# Altium PCB SmallHandheldRev1.PcbDoc (part 2 of 2)
Units mm, origin at the board's own origin, x right, y up, seen from the top; angles counter-clockwise.
Board outline 50.04 x 64.01 mm, 6 copper layers (TopLayer, MidLayer1, MidLayer2, MidLayer3, MidLayer4, BottomLayer); 248 components, 164 nets, 692 pads, 230 vias.
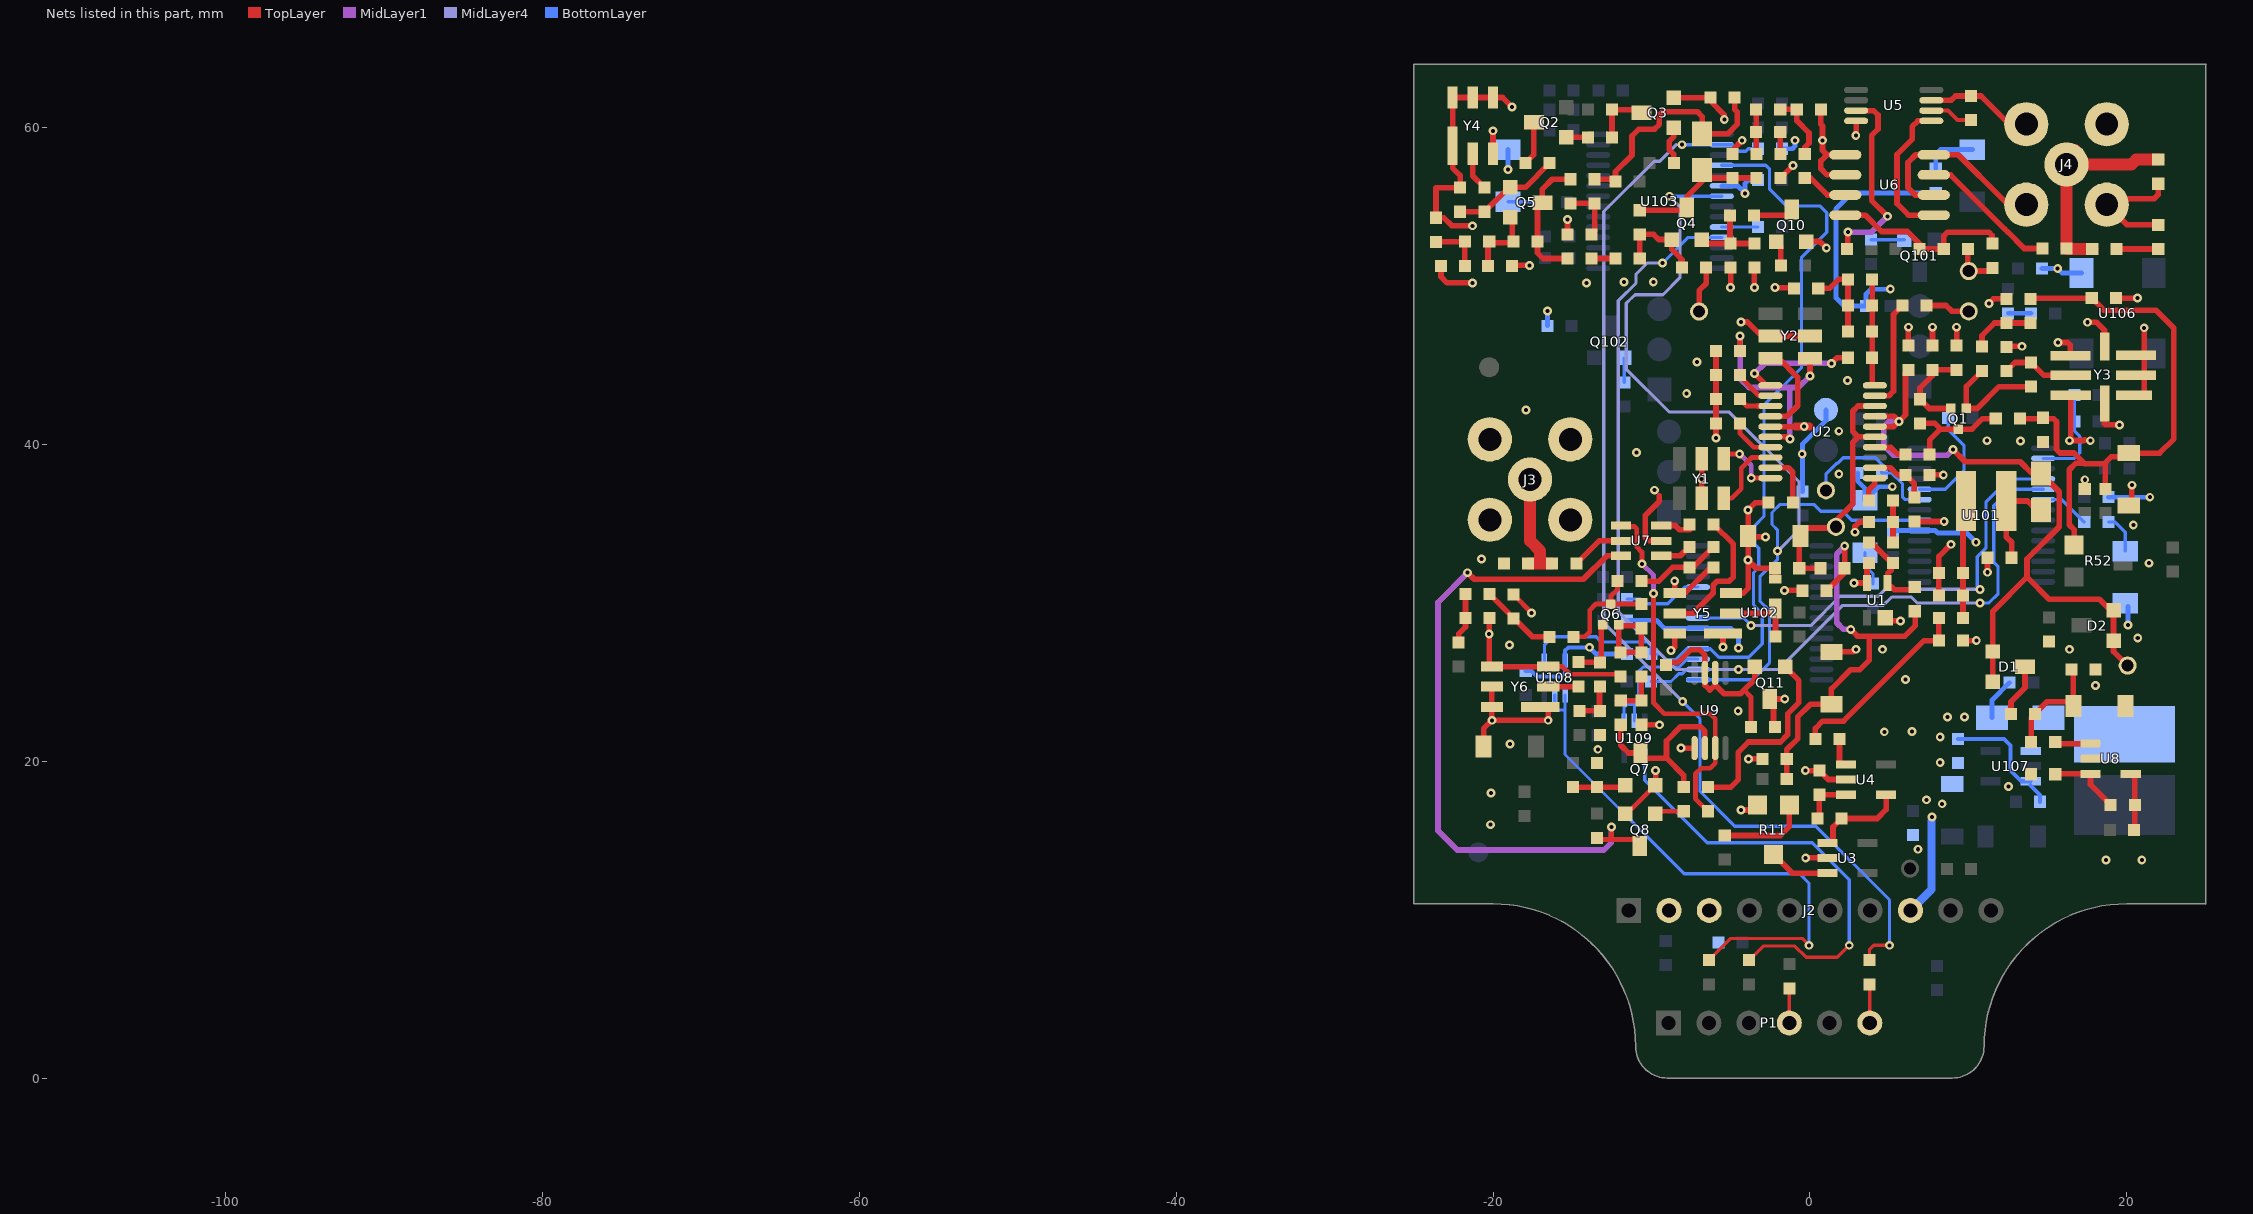
[diagram p6: the nets of this part, all layers, seen from the top]

## Via types
v1: diameter 0.559, hole 0.254, TopLayer to BottomLayer, tented both sides, 223 vias
v2: diameter 0.559, hole 0.254, TopLayer to BottomLayer, 7 vias

## Nets (pads, with @x,y where several pads share a name; then routed paths per layer and width w, separated by ;. In a path a pad name is that pad's centre, name@x,y a point inside that pad or via, vN(x,y) a via of type N, cw(c..) or ccw(c..) an arc to the next point about the centre after c; other vN are vias at no path point) (continued)
GND_SIGNAL: C3.2 C4.1 C5.2 C6.1 C7.2 C8.2 C10.2 C11.2 C12.2 C13.2 C14.2 C15.1 C16.1 C17.2 C18.2 C19.2 C22.2 C23.2 C25.2 C26.2 C27.1 C30.2 C31.2 C34.2 C35.1 C36.2 C41.2 C42.2 C45.2 C46.2 C47.1 C48.2 C50.2 C52.2 C53.2 C54.2 C56.2 C58.1 C61.2 D3.K FB101.1 J2.2 J2.3 J3.2 J3.3 J3.4 J3.5 J4.2 J4.3 J4.4 J4.5 L1.2 L6.2 L16.2 L17.1 Q3.E Q7.E Q8.E Q10.E Q11.C R2.2 R4.1 R6.2 R9.2 R11.3 R12.2 R15.2 R17.2 R18.1 R25.2 R26.2 R27.2 R28.2 R29.2 R36.2 R49.2 R55.1 R56.1 TP1.1 TP6.1 U1.1 U1.3 U2.15 U3.2 U4.2 U5.4 U5.7 U6.1 U6.2 U6.6 U6.8 U7.2 U8.2 U9.1 Y1.2 Y2.2 Y3.1 Y3.3 Y3.4 Y3.5 Y3.6 Y3.7 Y3.8 Y4.1 Y4.3 Y4.4 Y4.5 Y4.6 Y5.1 Y5.3 Y5.4 Y5.6 Y6.1 Y6.3 Y6.4 Y6.5 Y6.6 | length 185.1
  TopLayer w0.305: C42.2@-18.716,30.53 v1@-17.538,29.353 ; Y6.3@-16.51,25.975 -15.621,25.975 -15.138,25.492 -12.103,25.492 C46.2@-11.959,25.349 ; Q8.E@-11.666,16.691 -11.55,16.691 Q7.E@-9.749,18.491
  TopLayer w0.356: C36.2@-23.3,51.238 C36.2@-23.286,51.252 -23.286,50.586 -22.9,50.2 v1(-21.3,50.2) ; R25.2@-22.088,56.2 -23.6,56.2 -23.6,54.317 -23.117,54.317 -22.6,53.8 v1(-21.3,53.8) ; R25.2@-22.075,56.213 -22.075,56.975 -22.548,57.448 Y4.1@-22.548,58.854 Y4.6@-22.548,61.902 Y4.5@-21.278,61.902 Y4.4@-20.008,61.902 -19.402,61.902 v1(-18.8,61.3) ; C53.2@-20.595,20.929 -20.595,22.061 v1(-20.07,22.586) ; Y6.4@-20.244,25.975 C41.2@-20.244,29.006 ; C41.2@-20.24,29.006 C41.2@-20.214,29.032 ; Y6.5@-20.07,24.654 -20.07,24.081 v1(-20.07,22.586) ; Y6.4@-20.066,25.975 Y6.3@-16.51,25.975 ; Y4.3@-20,58.354 v1(-20,59.8) ; C35.1@-18.79,51.252 -18.742,51.3 v1(-17.7,51.3) ; Y6.1@-17.018,23.435 Y6.1@-16.51,23.435 ; Y6.1@-16.514,23.384 v1(-16.514,22.586) v1(-20.07,22.586) ; C27.1@-15.3,53.269 v1(-15.3,54.2) ; C47.1@-10.638,22.301 v1(-9.495,22.301) ; Q7.E@-9.749,18.491 Q7.E@-9.736,18.504 ; v1(-9.736,19.408) Q7.E@-9.736,18.504 ; Q7.E@-9.724,18.516 Q7.E@-9.736,18.504 ; -9.5,36.77 -9.5,36.414 -10.392,35.522 -10.392,35.22 -10.392,34.14 -10.163,33.912 U7.2@-9.38,33.912 ; v1@-8.738,27.016 -8.53,27.224 Y5.6@-8.53,28.069 ; Q3.E@-8.576,61.89 C26.2@-6.274,61.89 -6.274,61.674 -5.4,60.8 v1(-5.4,60.5) ; v1(-8.53,31.372) Y5.4@-8.53,30.609 -7.877,30.609 -6.251,32.235 L17.1@-6.074,32.235 ; v1(-8.136,20.831) U9.1@-7.272,20.831 ; TP1.1@-6.988,48.39 -6.988,49.712 -6.541,50.159 R26.2@-6.541,51.156 ; Y1.2@-6.826,36.302 Y1.2@-6.826,36.596 v1(-6.826,37.802) Y1.2@-6.826,38.802 ; v1(-5.926,40.416) C7.2@-5.926,41.33 C14.2@-5.926,42.854 C17.2@-5.926,44.378 R2.2@-5.926,45.902 ; v1(-5.482,27.206) Y5.1@-5.482,28.069 ; v1(-5,49.9) C34.2@-5,51.139 ; Y5.3@-4.974,30.609 -4.194,30.609 -3.894,30.91 v1(-3.894,32.693) ; C30.2@-4.89,58.322 C30.2@-4.89,58.344 -4.89,58.575 v1(-4.267,59.198) ; v1(-4.351,16.919) -3.598,16.919 R11.3@-3.294,17.224 ; v1(-4.346,47.729) -3.94,47.729 -3.055,46.845 Y2.2@-2.49,46.845 Y2.2@0.01,46.845 ; v1(-3.868,20.145) C8.2@-2.979,20.145 ; C12.2@-3.813,34.166 v1(-2.797,34.166) ; v1(-3.5,49.9) R27.2@-3.5,51.149 ; C5.2@-2.598,36.325 -3.437,36.325 v1(-3.894,35.868) C12.2@-3.894,34.217 v1(-3.894,32.693) ; U2.15@-2.493,41.124 -0.895,41.124 ; v1(-2.2,49.9) C61.2@-1.006,49.9 ; C48.2@-2.192,22.152 -2.294,22.253 -2.294,23.701 Q11.C@-2.522,23.93 v1(-1.582,23.93) ; D3.K@-2.167,31.525 -2.167,32.159 C13.2@-2.192,32.185 -3.386,32.185 v1(-3.894,32.693) ; C31.2@-1.842,56.82 -1.842,56.822 v1(-1.067,57.598) ; v1(-1.608,30.788) -0.49,30.788 C50.2@-0.465,30.762 ; v1(-0.287,19.408) R12.2@0.602,19.408 1.161,18.85 U4.2@2.278,18.85 ; v1(-0.262,13.897) U3.2@1.11,13.897 ; Q10.E@-0.215,52.807 0.625,52.807 v1(1.041,52.391) ; C45.2@0.7,61.147 0.7,60.2 0.8,60.1 v1(0.8,59.2) 0.8,58.567 1.084,58.284 ; C10.2@1.364,26.901 2.755,26.901 v1(2.921,27.067) ; U6.2@2.238,57.014 1.086,57.014 0.7,57.4 0.7,57.9 1.084,58.284 ; U6.1@2.238,58.284 1.084,58.284 ; v1(2.786,31.245) 2.794,31.253 U1.3@3.61,31.253 ; v1(2.845,34.458) 2.845,34.814 3.136,35.106 L1.2@3.726,35.106 ; v1@2.924,59.524 U5.4@2.924,60.423 ; U1.3@3.61,30.925 U1.3@3.61,31.253 ; C3.2@3.726,32.515 3.61,32.398 U1.3@3.61,31.253 ; U1.1@4.852,28.857 v1(5.733,28.857) ; C58.1@6.22,46.231 v1(6.22,47.399) ; C6.1@6.596,35.131 v1@8.484,35.131 ; C4.1@7.562,38.077 v1(8.425,38.077) ; U5.7@7.67,61.723 8.923,61.723 9.192,61.992 R55.1@10.185,61.992 10.808,61.992 12.205,60.595 12.586,60.214 J4.5@13.665,60.214 ; R18.1@7.744,46.231 v1(7.744,47.399) ; U6.6@7.826,55.744 6.656,55.744 6.2,56.2 6.2,57.8 6.684,58.284 U6.8@7.826,58.284 9.368,58.284 12.137,55.515 12.518,55.134 J4.4@13.665,55.134 ; R4.1@8.146,30.457 C16.1@8.146,31.88 8.146,32.82 8.146,32.927 v1(8.915,33.696) ; C23.2@9.268,46.231 v1(9.268,47.399) ; R9.2@9.67,27.613 v1(10.508,27.613) ; TP6.1@9.979,50.892 C54.2@9.979,52.34 ; TP6.1@10.033,50.943 11.201,50.943 R28.2@11.506,51.248 ; v1(11.219,31.931) C15.1@11.219,32.845 ; v1(11.3,48.9) 11.585,49.185 R15.2@12.413,49.185 ; L6.2@12.413,46.145 12.464,46.196 v1(13.404,46.196) ; R49.2@13.967,19.18 R49.2@14,19.147 ; v1(15.672,46.431) 16.121,46.431 16.281,46.431 16.452,46.261 Y3.1@16.452,45.604 ; Y3.3@16.477,43.089 16.477,40.329 16.561,40.246 17.306,40.246 17.357,40.296 ; C18.2@17.357,37.198 v1(17.357,37.769) ; v1(17.518,47.712) 18.099,47.712 18.602,47.209 Y3.8@18.602,46.397 ; Y3.4@18.602,41.897 18.602,41.294 18.661,41.235 v1(19.55,41.235) ; J4.3@18.745,55.134 20.015,53.864 20.828,53.864 C56.2@21.996,53.864 ; J4.3@18.745,55.515 19.177,55.515 21.742,55.515 21.996,55.769 R56.1@21.996,56.455 ; C22.2@19.322,49.236 v1(20.676,49.236) ; v1(20.329,37.426) 20.329,36.156 C52.2@20.354,36.131 ; Y3.5@21.101,43.089 21.101,44.359 21.101,45.629 v1@21.101,47.362
  TopLayer w0.508: -0.895,41.124 -0.006,41.124
  other v1: 18.694,13.757 20.955,13.757 6.833,14.443 -20.168,15.993 7.366,17.567 -20.117,17.999 12.548,18.406 -13.386,20.752 -18.923,21.098 4.699,21.86 6.452,21.885 -4.521,23.181 18.034,24.781 6.045,25.162 -8.763,26.991 4.597,27.067 16.383,27.067 -18.948,27.346 20.701,27.778 -20.24,28.041 -17.577,29.353 21.412,32.503 -20.726,32.757 20.422,34.916 8.484,35.144 -9.804,37.109 1.829,38.141 -10.947,39.488 1.829,40.834 -0.356,41.139 -17.907,42.18 -7.772,43.221 2.388,44.034 -7.112,45.203 21.107,47.362 -14.097,50.181 -11.735,50.257 -9.881,50.257 2.9,59.5
  other v2: 13.31,40.208 11.176,40.234 16.383,40.234 17.704,40.234
NBFLAG: U101.4 U102.21 | length 29
  MidLayer4 w0.203: v1(-3.708,28.566) 0.051,28.566 1.905,30.42 4.318,30.42 4.75,30.852 v1(10.744,30.852)
  BottomLayer w0.203: U102.21@-7.063,29.045 -4.188,29.045 v1(-3.708,28.566) ; v1(10.744,30.852) 10.566,31.029 10.566,32.909 11.125,33.468 11.125,36.389 12.553,37.817 U101.4@14.732,37.817
NetC1_1: C1.1 C3.1 L2.1 U1.4 | length 5.7
  TopLayer w0.356: C1.1@3.726,33.81 3.879,33.81 5.174,32.515 C3.1@5.25,32.515 5.123,32.388 5.123,32.058 4.91,31.844 U1.4@4.91,31.253 ; U1.4@4.92,30.991 4.91,31.001 U1.4@4.91,31.253 ; L2.1@6.622,30.991 6.467,30.836 5.327,30.836 U1.4@4.91,31.253
NetC1_2: C1.2 C2.1 L1.1 | length 2.6
  TopLayer w0.356: C1.2@5.25,33.81 L1.1@5.25,35.106 C2.1@5.25,36.452
NetC2_2: C2.2 U2.1 | length 1.6
  TopLayer w0.356: C2.2@3.726,36.452 3.726,37.138 4.107,37.519 U2.1@4.107,37.874
NetC4_2: C4.2 C6.2 U2.2 | length 3.8
  TopLayer w0.356: U2.2@4.107,38.524 5.083,38.524 5.53,38.077 C4.2@6.038,38.077 6.596,37.519 C6.2@6.596,36.655
NetC5_1: C5.1 U2.19 | length 3.5
  TopLayer w0.356: U2.19@-2.493,38.524 -1.343,38.524 -1.074,38.255 C5.1@-1.074,36.325
NetC7_1: C7.1 U2.17 | length 2.9
  TopLayer w0.305: C7.1@-4.402,41.33 -4.402,40.678 -3.548,39.824 U2.17@-2.493,39.824
  TopLayer w0.356: C7.1@-4.402,41.33 C7.1@-4.396,41.324
NetC8_1: C8.1 C10.1 C50.1 L2.2 R1.1 R3.1 | length 27.1
  TopLayer w0.356: R3.1@-1.455,18.875 C8.1@-1.455,20.145 -1.455,20.729 -0.77,21.415 -0.77,22.787 0.043,23.599 C10.1@1.364,23.599 1.364,24.565 2.583,25.784 3.162,25.784 3.759,26.381 3.759,27.9 ; C50.1@1.059,30.762 2.202,31.905 R1.1@2.202,32.185 v1(2.202,33.582) ; v1(2.583,28.324) 3.007,27.9 3.759,27.9 ; L2.2@6.622,29.467 6.647,29.441 6.647,28.547 6,27.9 3.759,27.9
  MidLayer1 w0.356: v1(2.202,33.582) 1.702,33.081 1.702,28.743 2.121,28.324 v1(2.583,28.324)
NetC9_1: C9.1 C20.1 L5.2 Q1.C | length 7.1
  TopLayer w0.356: C20.1@6.952,41.329 7.892,41.329 8.252,40.968 ; C9.1@7.562,39.373 7.562,40.278 8.252,40.968 ; L5.2@11.735,41.631 10.897,41.631 10.234,40.968 Q1.C@9.382,40.968 8.252,40.968
NetC9_2: C9.2 U2.4 | length 2.1
  TopLayer w0.356: U2.4@4.107,39.824 5.104,39.824 5.555,39.373 C9.2@6.038,39.373
NetC11_1: C11.1 Q7.B R40.2 | length 3.4
  TopLayer w0.356: R40.2@-14.956,18.364 C11.1@-13.432,18.364 -11.781,18.364 Q7.B@-11.654,18.491
NetC12_1: C12.1 C13.1 R1.2 TP2.1 U2.5 U2.8 | length 16.6
  TopLayer w0.356: R1.2@0.678,32.185 C13.1@-0.668,32.185 -0.668,34.14 C12.1@-0.592,34.217 -0.592,34.471 -0.338,34.725 1.572,34.725 TP2.1@1.648,34.801 1.648,35.186 2.71,36.249 2.71,40.128 3.057,40.474 ; U2.5@4.107,40.474 3.057,40.474 ; U2.8@4.107,42.424 3.044,42.424 2.71,42.091 2.71,40.821 3.057,40.474
NetC14_1: C14.1 U2.13 | length 2.9
  TopLayer w0.305: C14.1@-4.402,42.854 -3.972,42.424 U2.13@-2.493,42.424
  TopLayer w0.356: -3.306,42.424 U2.13@-2.493,42.424
NetC15_2: C15.2 L3.1 L4.1 | length 6.2
  TopLayer w0.356: C15.2@12.743,32.845 12.743,33.822 12.4,34.166 L4.1@12.4,36.426 13.739,36.426 14.298,35.868 L3.1@14.602,35.868
NetC16_2: C16.2 C51.2 L4.2 R4.2 | length 7.5
  TopLayer w0.356: C51.2@9.67,29.035 R4.2@9.67,30.457 C16.2@9.67,31.88 9.67,36.236 L4.2@9.86,36.426 ; L4.2@9.67,36.426 L4.2@9.67,36.503
NetC17_1: C17.1 U2.12 | length 2.5
  TopLayer w0.305: C17.1@-4.402,44.378 -4.402,44.269 -3.207,43.074 U2.12@-2.493,43.074
NetC19_1: C19.1 C22.1 C52.1 L5.1 R7.1 R13.1 R52.1 | length 37.4
  TopLayer w0.356: L5.1@13.259,41.631 14.757,41.631 14.783,41.656 14.808,41.631 15.392,41.631 15.576,41.447 15.576,39.684 15.803,39.457 16.673,39.457 17.311,38.818 ; R13.1@14.165,49.236 C22.1@17.798,49.236 18.56,48.474 21.836,48.474 22.979,47.331 22.979,40.346 22.082,39.449 C52.1@20.135,39.449 ; R52.1@16.685,33.642 16.685,34.623 16.38,34.928 16.38,38.4 16.798,38.818 17.311,38.818 ; R7.1@18.652,37.198 18.652,38.696 18.576,38.772 ; C52.1@20.601,39.433 20.354,39.433 20.354,39.28 20.405,39.23 20.135,39.23 19.033,39.23 18.576,38.772 ; 17.311,38.818 17.357,38.772 18.576,38.772
NetC20_2: C20.2 C23.1 Q1.E R18.2 | length 5.9
  TopLayer w0.356: Q1.E@8.882,42.268 7.536,42.268 C20.2@6.952,42.853 6.952,43.559 7.744,44.351 R18.2@7.744,44.707 C23.1@9.268,44.707
NetC21_1: C21.1 Q1.B R14.1 | length 7.4
  TopLayer w0.356: R14.1@10.871,44.644 9.882,43.655 Q1.B@9.882,42.268 10.568,42.268 11.946,43.646 12.262,43.646 12.5,43.646 C21.1@13.969,43.646
NetC21_2: C21.2 L6.1 Y3.2 | length 4.3
  TopLayer w0.356: L6.1@12.413,44.621 12.962,45.17 C21.2@13.969,45.17 14.779,44.359 Y3.2@16.121,44.359
NetC24_1: C24.1 C49.1 L18.1 R54.2 U2.10 | length 6.8
  TopLayer w0.356: C49.1@3.934,50.422 R54.2@3.934,48.771 L18.1@3.934,47.12 C24.1@3.934,45.469 3.934,43.897 U2.10@4.107,43.724
NetC24_2: C24.2 U2.11 | length 7.6
  TopLayer w0.356: v1(-3.483,44.478) -2.729,43.724 U2.11@-2.493,43.724 ; v1(1.369,45.113) 1.724,45.469 C24.2@2.41,45.469
  MidLayer1 w0.356: v1(-3.483,44.478) -2.848,45.113 v1(1.369,45.113)
NetC25_1: C25.1 R16.1 R17.1 R37.1 | length 7.1
  TopLayer w0.356: R37.1@13.967,21.212 13.967,22.736 R16.1@14.221,22.99 14.983,23.752 C25.1@16.634,23.752 ; R17.1@16.507,25.784 16.634,25.657 C25.1@16.634,23.752 ; C25.1@16.634,23.498 C25.1@16.634,23.752 ; C25.1@16.761,23.752 C25.1@16.634,23.752
NetC26_1: C26.1 FB6.2 L7.1 R20.1 | length 15.5
  TopLayer w0.356: R20.1@-13.453,56.607 R20.1@-13.583,56.738 FB6.2@-12.399,56.738 ; FB6.2@-12.268,56.607 -12.268,57.217 -11.227,58.258 -11.227,59.468 -10.795,59.9 -9.8,59.9 -9.5,60.2 -9.5,60.798 -9.298,61 -7.1,61 -6.795,60.695 L7.1@-6.795,59.614 -5.176,59.614 -4.574,60.216 -4.574,60.974 -4.75,61.15 C26.1@-4.75,61.89
NetC27_2: C27.2 L8.1 R20.2 | length 3.6
  TopLayer w0.356: L8.1@-15.107,55.214 R20.2@-13.583,55.214 -13.583,53.461 C27.2@-13.787,53.258
NetC28_1: C28.1 U6.3 | length 3
  TopLayer w0.356: C28.1@-0.318,56.82 0.041,56.82 1.118,55.744 U6.3@2.238,55.744
NetC28_2: C28.2 C45.1 L12.2 | length 4.3
  TopLayer w0.356: L12.2@-1.866,61.147 C45.1@-0.824,61.147 -0.824,60.443 -0.051,59.669 -0.051,59.02 -0.318,58.753 C28.2@-0.318,58.344
NetC29_1: C29.1 L10.1 | length 1.5
  TopLayer w0.356: C29.1@-13.787,51.734 L10.1@-12.263,51.734
NetC29_2: C29.2 C33.2 L8.2 Q5.C | length 8.2
  TopLayer w0.356: C29.2@-15.311,51.734 -16.834,51.734 -17.19,52.09 C33.2@-17.19,52.801 -17.19,54.96 Q5.C@-16.885,55.265 -16.885,56.115 -16.262,56.738 L8.2@-15.107,56.738
NetC30_1: C30.1 L7.2 L9.1 Q4.C R24.1 | length 8.7
  TopLayer w0.356: R24.1@-10.739,54.782 Q4.C@-7.76,54.782 ; Q4.C@-7.76,54.966 -7.76,55.64 -6.795,56.605 L7.2@-6.795,57.328 ; L7.2@-6.287,56.82 C30.1@-4.89,56.82 L9.1@-3.366,56.82
NetC31_1: C31.1 L15.2 | length 1.4
  TopLayer w0.356: C31.1@-1.866,58.368 L15.2@-1.866,59.724
NetC32_1: C32.1 Y4.2 | length 2.4
  TopLayer w0.356: Y4.2@-21.278,58.346 -21.278,56.948 C32.1@-20.543,56.213
NetC32_2: C32.2 Q5.B R23.2 R25.1 | length 6.9
  TopLayer w0.356: R25.1@-22.075,54.689 C32.2@-20.543,54.689 -19.002,56.23 Q5.B@-18.917,56.23 -17.959,56.23 R23.2@-16.426,57.762
NetC33_1: C33.1 C35.2 L11.1 Q5.E | length 4.7
  TopLayer w0.356: C35.2@-20.314,51.252 -20.314,52.725 -18.79,52.725 -18.79,54.198 Q5.E@-18.917,54.325
NetC34_1: C34.1 Q4.E R27.1 R30.2 | length 5.2
  TopLayer w0.356: Q4.E@-6.821,52.934 -6.567,52.68 C34.1@-5.017,52.68 R27.1@-3.493,52.68 ; C34.1@-5.043,52.706 R30.2@-5.043,54.458
NetC36_1: C36.1 L11.2 R29.1 | length 3.3
  TopLayer w0.356: R29.1@-23.591,52.784 -21.779,52.784 C36.1@-21.779,51.269
NetC37_1: C37.1 J4.1 L19.2 R56.2 | length 14
  TopLayer w0.762: C37.1@16.205,52.365 J4.1@16.205,57.674 ; C37.1@16.231,52.34 L19.2@17.831,52.34 ; J4.1@16.739,58.588 16.205,58.055 J4.1@16.205,57.674 ; R56.2@21.996,57.979 20.599,57.979 20.295,57.674 J4.1@16.205,57.674
NetC37_2: C37.2 U6.7 | length 8.8
  TopLayer w0.356: U6.7@7.826,57.014 8.886,57.014 12.33,53.57 12.5,53.4 13.535,52.365 C37.2@14.681,52.365
NetC38_1: C38.1 D3.A R46.2 Y5.2 | length 5
  TopLayer w0.356: Y5.2@-4.974,29.339 -2.218,29.339 C38.1@-2.167,29.391 ; R46.2@-2.167,27.867 C38.1@-2.167,29.391 ; D3.A@-2.167,30.051 C38.1@-2.167,29.391
NetC39_1: C39.1 U7.1 | length 1.9
  TopLayer w0.356: U7.1@-9.38,34.877 -8.495,34.877 -8.242,34.624 -7.598,34.624 C39.1@-7.585,34.624
NetC39_2: C39.2 Y5.5 | length 8.8
  TopLayer w0.356: Y5.5@-8.53,29.339 -7.369,29.339 -6.099,30.61 -6.099,31.118 -5.845,31.372 -5.083,31.372 -4.829,31.626 -4.829,33.709 C39.2@-6.074,34.953
NetC40_1: C40.1 C60.2 L17.2 | length 5.6
  TopLayer w0.356: C40.1@-10.625,31.372 -9.528,31.372 -8.664,32.235 L17.2@-7.598,32.235 ; L17.2@-7.725,32.362 L17.2@-7.598,32.235 ; C60.2@-6.074,33.556 -7.394,32.235 L17.2@-7.598,32.235
NetC40_2: C40.2 C43.1 L13.2 Q6.C | length 7.5
  TopLayer w0.305: L13.2@-14.91,27.854 -14.199,27.854 -13.894,28.159 -13.894,29.544 -13.513,29.925 Q6.C@-12.561,29.925 ; Q6.C@-12.555,29.925 -12.555,30.432 -12.149,30.838 C40.2@-12.149,31.372 ; Q6.C@-12.552,29.921 C43.1@-10.638,29.921
NetC41_1: C41.1 R33.2 R43.2 | length 3.2
  TopLayer w0.356: R43.2@-22.17,27.512 -22.17,28.041 -21.738,28.473 C41.1@-21.738,29.032 R33.2@-21.738,30.556
NetC42_1: C42.1 L13.1 R33.1 | length 5.1
  TopLayer w0.356: R33.1@-20.213,30.557 R33.1@-20.214,30.556 -17.513,27.854 -16.967,27.854 ; -17.196,27.854 -16.967,27.854 ; L13.1@-16.434,27.854 -16.967,27.854
NetC43_2: C43.2 C46.1 L14.2 Q6.E | length 6.4
  TopLayer w0.356: C46.1@-12.162,26.873 -12.061,26.974 Q6.E@-12.061,28.625 -11.985,28.549 -10.791,28.549 C43.2@-10.638,28.397 L14.2@-10.638,26.873 C46.1@-11.959,26.873 C46.1@-12.162,26.873
NetC44_1: C44.1 Q6.B R35.1 | length 3.7
  TopLayer w0.356: C44.1@-14.605,26.254 R35.1@-13.335,26.254 ; R35.1@-13.178,26.254 -13.178,28.508 Q6.B@-13.061,28.625
NetC44_2: C44.2 Y6.2 | length 2
  TopLayer w0.356: Y6.2@-16.51,24.705 C44.2@-14.548,24.705
NetC47_2: C47.2 L14.1 R39.2 | length 3
  TopLayer w0.356: R39.2@-12.162,23.825 R39.2@-11.934,23.825 C47.2@-10.638,23.825 L14.1@-10.638,25.349
NetC48_1: C48.1 Q11.E R38.1 U9.6 U9.7 | length 13.2
  TopLayer w0.305: -4.148,24.488 -3.716,24.057 C48.1@-3.716,22.152
  TopLayer w0.356: R38.1@-9.075,26.063 -8.898,26.241 -8.313,26.241 -7.526,27.028 -6.942,27.028 -6.622,26.709 U9.7@-6.622,25.577 -6.622,24.804 -6.307,24.488 U9.6@-5.972,24.823 ; U9.6@-5.972,25.831 U9.6@-5.972,25.577 U9.6@-5.972,24.823 ; Q11.E@-3.462,25.962 -3.462,25.174 -4.148,24.488 -4.376,24.26 -5.409,24.26 U9.6@-5.972,24.823
NetC49_2: C49.2 C61.1 L18.2 R54.1 | length 5.4
  TopLayer w0.356: C61.1@0.533,49.851 1.251,49.851 1.822,50.422 C49.2@2.41,50.422 R54.1@2.41,48.771 L18.2@2.41,47.12
NetC51_1: C51.1 R8.1 R9.1 | length 12.4
  TopLayer w0.356: R8.1@0.348,21.415 0.348,22.075 0.805,22.533 2.133,22.533 7.213,27.613 R9.1@8.146,27.613 ; R9.1@8.019,27.486 R9.1@8.146,27.613 ; C51.1@8.146,29.035 R9.1@8.146,27.613
NetC54_1: C54.1 R5.2 R28.1 U6.4 | length 11.7
  TopLayer w0.356: U6.4@2.238,54.474 3.5,54.474 4.533,53.441 6.159,53.441 6.931,52.669 R5.2@6.931,52.34 C54.1@8.455,52.34 8.455,53.155 8.7,53.4 11.3,53.4 11.503,53.197 R28.1@11.503,52.848
NetC56_1: C56.1 L19.1 | length 2.6
  TopLayer w0.356: L19.1@19.355,52.34 C56.1@21.946,52.34
NetC58_2: C58.2 D1.A D2.A L3.2 TP3.1 U2.6 U2.7 | length 45.6
  TopLayer w0.356: U2.6@4.107,41.124 5.3,41.124 v1(5.631,41.456) ; U2.7@4.107,41.774 5.313,41.774 v1(5.631,41.456) ; C58.2@6.22,44.707 6.042,44.529 6.042,41.867 v1(5.631,41.456) ; v1(9.035,39.678) 9.809,38.903 13.284,38.903 14.034,38.154 L3.2@14.602,38.154 15.745,37.011 15.745,34.801 13.713,32.769 13.713,31.626 ; D1.A@11.554,25.022 D1.A@11.554,26.927 11.554,29.467 13.713,31.626 ; TP3.1@20.063,26.038 19.174,26.927 D2.A@19.174,27.613 D2.A@19.174,29.518 18.996,29.518 18.285,30.229 15.11,30.229 13.713,31.626
  MidLayer1 w0.356: v1(5.631,41.456) 5.016,41.456 4.674,41.113 4.674,39.919 5.283,39.31 8.667,39.31 v1(9.035,39.678)
NetC59_1: C59.1 J3.1 L16.1 | length 7
  TopLayer w0.762: L16.1@-17.783,32.486 C59.1@-16.264,32.472 ; J3.1@-17.661,37.781 -17.656,33.912 -17.021,33.277 -17.021,32.515
NetC59_2: C59.2 U7.5 | length 3.4
  TopLayer w0.356: C59.2@-14.74,32.472 -13.3,33.912 U7.5@-11.92,33.912
NetC60_1: C60.1 U7.3 | length 2
  TopLayer w0.356: U7.3@-9.38,32.972 -8.182,32.972 C60.1@-7.598,33.556
NetC62_1: C62.1 TP4.1 | length 2.8
  TopLayer w0.356: C62.1@7.363,48.771 8.6,48.771 8.968,48.403 TP4.1@10.033,48.403
NetC62_2: C62.2 U2.9 | length 6.9
  TopLayer w0.356: U2.9@4.107,43.074 4.994,43.074 5.28,43.361 5.28,48.212 C62.2@5.839,48.771
NetC121_2: C121.2 R126.1 | length 1.4
  BottomLayer w0.305: R126.1@12.522,48.276 C121.2@13.97,48.276
NetD1_K: D1.K R16.2 | length 3.3
  TopLayer w0.356: R16.2@12.697,22.99 12.697,23.752 13.586,24.641 D1.K@13.586,25.962
NetD4_A: D4.A R32.1 | length 3.4
  BottomLayer w0.305: R32.1@7.95,57.404 7.95,58.318 8.255,58.623 10.251,58.623 D4.A@10.262,58.613
NetD101_K: D101.K R111.1 | length 2.5
  BottomLayer w0.203: R111.1@18.847,35.093 19.279,35.093 19.914,34.458 D101.K@19.914,33.264
NetD102_K: D102.K R119.1 | length 2.2
  BottomLayer w0.203: D102.K@3.48,33.164 3.48,32.35 3.988,31.842 R119.1@3.988,31.207
NetD103_K: D103.K R118.1 | length 2.2
  BottomLayer w0.203: D103.K@-19.05,55.313 R118.1@-16.866,55.313
NetD105_A: D105.A L102.2 U107.1
NetL9_2: L9.2 L12.1 L15.1 | length 2.8
  TopLayer w0.356: L9.2@-3.39,58.368 L15.1@-3.39,59.724 L12.1@-3.39,61.147
NetL10_2: L10.2 Q4.B R24.2 R26.1 | length 5.7
  TopLayer w0.356: L10.2@-10.739,51.734 R24.2@-10.739,53.258 -9.858,53.258 -9.534,52.934 Q4.B@-8.726,52.934 -8.726,52.326 -8.065,51.665 R26.1@-8.065,51.156
NetP1_4: P1.4 R112.1 | length 2.2
  TopLayer w0.203: P1.4@-1.295,3.48 R112.1@-1.295,5.664
NetQ2_B: Q2.B R21.2 | length 1.4
  TopLayer w0.356: Q2.B@-15.387,59.38 R21.2@-14.015,59.38
NetQ2_C: Q2.C R23.1 | length 2.8
  TopLayer w0.356: R23.1@-17.95,57.762 -17.419,58.294 Q2.C@-17.419,60.345
NetQ3_B: Q3.B R22.1 | length 2.4
  TopLayer w0.356: R22.1@-8.585,57.776 -8.585,58.309 -8.865,58.588 -8.865,59.146 -8.584,59.427 Q3.B@-8.584,59.977
NetQ3_C: Q3.C R19.2 R21.1 | length 3.7
  TopLayer w0.356: R21.1@-12.491,59.38 R19.2@-12.491,61.132 -10.806,61.132 Q3.C@-10.616,60.942
NetQ7_C: Q7.C R39.1 R51.1 U9.2 | length 12.1
  TopLayer w0.356: R39.1@-11.934,22.301 -11.934,21.005 -11.451,20.523 Q7.C@-10.689,20.523 -10.689,20.208 -10.701,20.196 -10.689,20.196 -9.05,20.196 ; R51.1@-7.958,18.367 -7.958,19.104 -9.05,20.196 ; U9.2@-6.622,20.831 -6.622,21.908 -6.891,22.177 -8.161,22.177 -9.05,21.288 -9.05,20.196
NetQ8_B: Q8.B R42.1 | length 1.9
  TopLayer w0.305: Q8.B@-9.761,16.691 -9.609,16.843 R42.1@-7.958,16.843
NetQ8_C: Q8.C R41.1 U7.4 | length 44.4
  TopLayer w0.305: R41.1@-13.444,15.167 -13.343,15.065 -12.53,15.065 ; v1(-12.53,15.852) -12.53,15.065 ; Q8.C@-10.777,15.065 -12.53,15.065 ; Q8.C@-10.726,14.659 Q8.C@-10.726,15.014
  TopLayer w0.356: v1(-21.6,31.9) -21.187,31.487 -20.625,31.487 ; -20.98,31.487 -20.625,31.487 ; U7.4@-11.92,32.972 -12.815,32.972 -14.3,31.487 -20.625,31.487
  MidLayer1 w0.356: v1(-21.6,31.9) -23.47,30.03 -23.47,15.612 -22.258,14.4 -13,14.4 -12.53,14.87 v1(-12.53,15.852)
NetQ10_B: Q10.B R48.1 | length 1.6
  TopLayer w0.356: Q10.B@-2.12,52.807 -1.829,52.516 R48.1@-1.829,51.299
NetQ10_C: Q10.C R30.1 | length 2.5
  TopLayer w0.356: R30.1@-3.519,54.458 -1.536,54.458 Q10.C@-1.155,54.839
NetQ11_B: Q11.B R51.2 | length 12.4
  TopLayer w0.356: R51.2@-6.434,18.367 -4.986,18.367 -4.529,18.824 -4.529,20.551 -3.868,21.212 -1.862,21.212 -1.405,21.669 -1.405,22.99 -0.693,23.701 -0.693,25.098 Q11.B@-1.557,25.962
NetQ101_B: Q101.B R120.2 | length 2.1
  BottomLayer w0.203: R120.2@3.861,52.924 Q101.B@5.969,52.924
NetQ102_B: Q102.B R121.2 | length 1.5
  BottomLayer w0.203: R121.2@-11.709,43.907 Q102.B@-11.709,45.457
NetR2_1: R2.1 U2.16 Y2.1 | length 14
  TopLayer w0.305: R2.1@-4.402,45.902 v1@-4.402,46.836
  TopLayer w0.356: U2.16@-2.493,40.474 v1@-1.388,40.474 ; v1(0.01,44.329) Y2.1@0.01,45.445
  MidLayer1 w0.356: v1(-4.397,46.84) -4.397,44.148 -3.838,43.589 -0.731,43.589 v1(0.01,44.329) ; v1(-1.261,40.347) -1.261,43.581
NetR8_2: R8.2 U4.1 | length 2
  TopLayer w0.356: R8.2@1.872,21.415 1.872,19.815 1.897,19.789 U4.1@2.278,19.789
NetR10_1: R10.1 R12.1 U4.3 | length 3.2
  TopLayer w0.356: R10.1@0.475,16.386 0.602,16.513 R12.1@0.602,17.884 U4.3@2.278,17.884
NetR10_2: R10.2 U3.1 U4.4 | length 6.1
  TopLayer w0.356: U3.1@1.11,14.836 1.466,14.836 1.466,15.852 R10.2@1.999,16.386 4.26,16.386 4.818,16.945 U4.4@4.818,17.884
NetR11_1: R11.1 R47.1 | length 5.7
  TopLayer w0.356: R47.1@-5.369,15.311 -1.87,15.311 -1.294,15.887 R11.1@-1.294,17.224
NetR11_2: R11.2 U3.3 | length 3.9
  TopLayer w0.356: R11.2@-2.294,14.124 -1.101,12.931 U3.3@1.11,12.931
NetR13_2: R13.2 R14.2 R15.1 | length 4.1
  TopLayer w0.356: R14.2@10.871,46.168 10.871,46.871 11.661,47.661 R15.1@12.413,47.661 R13.2@13.937,47.661
NetR34_2: R34.2 R35.2 R36.1 | length 2.8
  TopLayer w0.356: R34.2@-14.55,23.181 R36.1@-13.28,23.181 ; R36.1@-13.28,23.19 R35.2@-13.28,24.714
NetR37_2: R37.2 U8.1 | length 2.3
  TopLayer w0.356: R37.2@15.491,21.212 15.593,21.11 U8.1@17.722,21.11
NetR42_2: R42.2 U7.6 U9.3 | length 23.8
  TopLayer w0.305: U7.6@-11.92,34.877 -11.867,34.823 -11.074,34.823 -10.925,34.674 -10.925,33.531 -10.599,33.205 v1(-10.599,32.464) ; v1(-9.863,30.584) -9.863,23.676 -9.187,22.999 -6.291,22.999 -5.972,22.68 U9.3@-5.972,20.831 -5.972,19.87 -6.281,19.561 -6.866,19.561 -7.221,19.205 -7.221,17.63 R42.2@-6.434,16.843
  MidLayer1 w0.305: v1(-10.599,32.464) -9.863,31.727 v1(-9.863,30.584)
NetR49_1: R49.1 R50.1 U8.3 | length 4.7
  TopLayer w0.356: R49.1@15.491,19.18 15.516,19.205 U8.3@17.722,19.205 17.722,18.519 R50.1@18.992,17.249
NetR53_1: R53.1 U5.3 | length 12.5
  TopLayer w0.356: R53.1@2.359,52.34 2.4,52.381 v1(2.4,53.4) ; U5.3@2.924,61.073 4.027,61.073 4.3,60.8 4.3,59.9 3.9,59.5 3.9,55.4 v1(4.9,54.4)
  MidLayer1 w0.356: v1(2.4,53.4) 3.9,53.4 v1(4.9,54.4)
NetR55_2: R55.2 U5.6 | length 2.8
  TopLayer w0.254: U5.6@7.67,61.073 8.727,61.073 9.332,60.468 R55.2@10.185,60.468
NetR102_1: R102.1 U101.24 | length 7
  BottomLayer w0.203: U101.24@6.932,37.167 8.551,37.167 9.728,38.345 9.728,39.945 8.738,40.935 R102.1@8.738,41.697
NetR104_2: R104.2 U102.24 | length 5
  BottomLayer w0.203: R104.2@-11.532,30.242 -10.693,30.242 -10.389,29.937 -8.966,29.937 -8.204,30.699 -7.909,30.995 U102.24@-7.063,30.995
NetR106_1: R106.1 U103.24 | length 2.3
  BottomLayer w0.203: U103.24@-5.56,53.721 R106.1@-3.286,53.721
NetR130_1: R130.1 R131.2 U107.3 | length 7.9
  BottomLayer w0.254: R130.1@9.347,21.403 12.268,21.403 12.675,20.996 12.675,19.422 13.36,18.736 U107.3@13.945,18.736 ; 13.945,18.456 14.529,17.872 R131.2@14.529,17.44
NetR132_2: R132.2 TP121.1 U101.23 | length 9.3
  BottomLayer w0.203: TP121.1@1.016,37.1 1.016,38.119 1.708,38.811 1.753,38.811 2.099,39.157 4.14,39.157 4.547,38.751 R132.2@4.547,38.192 5.182,38.192 5.842,37.532 5.842,36.694 6.019,36.517 U101.23@6.932,36.517
NetU2_14: U2.14 Y2.4 | length 6
  TopLayer w0.356: U2.14@-2.493,41.774 -1.433,41.774 -0.765,42.442 -0.765,44.232 -1.978,45.445 Y2.4@-2.49,45.445
NetU2_18: U2.18 Y1.4 | length 4.8
  TopLayer w0.305: Y1.4@-5.426,36.596 -4.932,36.596 -4.326,37.202 -4.326,38.502 -3.654,39.174 U2.18@-2.493,39.174
NetU2_20: U2.20 Y1.1 | length 4.3
  TopLayer w0.305: Y1.1@-5.426,39.096 -5.426,39.302 -5.326,39.402 v1(-4.426,39.402) ; v1(-3.698,37.874) U2.20@-2.493,37.874
  MidLayer1 w0.305: v1(-4.426,39.402) -3.698,38.674 v1(-3.698,37.874)
NetU5_5: U5.5 U6.5 | length 9.2
  TopLayer w0.356: U5.5@7.67,60.423 6.823,60.423 6.458,60.058 6.458,59.258 5.5,58.3 5.5,55.2 6.226,54.474 U6.5@7.826,54.474
PIR: FB106.2 P1.6 | length 2.4
  TopLayer w0.203: FB106.2@3.759,5.918 3.785,5.893 P1.6@3.785,3.48
PNCLK: U101.21 U102.15 U103.21 | length 61.6
  MidLayer4 w0.203: v1(-8.865,55.667) -8.204,55.007 -8.204,50.511 -9.271,49.444 -11.033,49.444 -11.236,49.241 -11.255,49.241 -11.582,48.914 -11.582,44.745 -8.89,42.053 -5.105,42.053 -0.686,37.633 -0.686,34.611 v1(-2.032,33.265)
  BottomLayer w0.203: v1@-8.861,55.671 U103.21@-5.56,55.671 ; U102.15@-7.724,25.145 U102.15@-7.063,25.145 -3.624,25.145 -2.54,26.229 -2.54,29.505 -3.15,30.115 -3.15,31.639 -2.032,32.757 v1(-2.032,33.265) -2.032,34.585 -2.389,34.942 -2.389,35.702 -1.88,36.211 0.254,36.211 0.686,35.779 2.083,35.779 2.645,35.217 U101.21@6.932,35.217
PNDAT: R108.2 U101.5 U102.16 U103.25 | length 71
  MidLayer4 w0.203: v1(-9.296,51.451) -10.262,51.451 -10.973,50.74 -10.973,50.183 -12.09,49.065 -12.09,29.439 -8.449,25.797 v1(-4.496,25.797) -1.956,25.797 2.083,29.836 4.648,29.836 5.182,30.369 6.401,30.369 6.782,29.988 v1(10.744,29.988)
  BottomLayer w0.203: R108.2@-10.033,25.035 -8.763,25.035 -8.272,25.526 -8.044,25.526 -7.775,25.795 U102.16@-7.063,25.795 v1@-4.496,25.795 ; v1(-9.296,51.451) -7.677,53.071 U103.25@-5.56,53.071 ; v1(10.744,29.988) 11.303,29.988 11.887,30.572 11.887,32.274 11.608,32.553 11.608,36.135 12.64,37.167 U101.5@14.732,37.167
RLED: R111.2 U101.6 | length 3.2
  BottomLayer w0.203: U101.6@14.732,36.517 15.899,36.517 R111.2@17.323,35.093
RSSI: FB3.1 R50.2 U8.4 | length 3.7
  TopLayer w0.356: U8.4@20.262,19.205 20.516,18.951 R50.2@20.516,17.249 20.516,15.706 FB3.1@20.472,15.662
RSSI-D: C114.1 R115.2 U101.2 | length 6.2
  BottomLayer w0.203: U101.2@14.732,39.117 16.698,39.117 17.043,39.462 17.043,40.504 16.713,40.834 R115.2@16.713,41.443 C114.1@16.713,43.12
TTL_RXD: R109.2 U102.18 U103.18 U108.4 | length 54.2
  BottomLayer w0.203: U108.4@-16.754,26.364 -16.754,27.331 -16.231,27.854 -13.487,27.854 -13.157,27.524 -10.236,27.524 -10.008,27.296 R109.2@-10.008,26.762 -9.423,26.762 -9.068,26.407 -8.458,26.407 U102.18@-7.77,27.095 ; U102.18@-7.063,27.095 -6.276,27.095 -5.74,26.559 -3.861,26.559 -2.997,27.423 -2.997,29.328 -3.556,29.886 -3.556,31.893 -3.226,32.223 -3.226,33.442 -3.454,33.671 -3.454,34.89 -2.896,35.449 -2.896,42.459 -0.533,44.822 -0.533,51.781 1.067,53.381 1.067,54.626 0.635,55.058 -1.499,55.058 -2.54,56.099 -2.54,57.369 -2.792,57.621 U103.18@-5.56,57.621
TTL_TXD: U102.17 U109.1 U109.2 | length 8.9
  BottomLayer w0.203: U109.1@-11.724,22.554 -11.724,23.394 -11.532,23.587 -11.074,23.587 ; U109.2@-11.074,22.554 -11.074,23.587 ; U102.17@-7.063,26.445 -7.76,26.445 -8.255,25.949 -10.516,25.949 -10.795,25.67 -10.795,23.867 -11.074,23.587
VCC: C101.1 C102.1 C107.1 C109.1 C125.1 C302.1 C303.1 D101.A D102.A D103.A D105.K FB5.1 J2.8 R32.2 R101.1 R103.1 R105.1 R109.1 R110.1 R130.2 R132.1 R133.1 TP119.1 U101.20 U102.20 U103.20 U106.4 U108.5 | length 70.7
  BottomLayer w0.254: C302.1@-17.932,25.695 -17.577,25.695 -17.221,25.34 -15.697,25.34 -15.454,25.583 U108.5@-15.454,26.364 -15.454,26.98 -15.24,27.194 v1(-13.919,27.194)
  BottomLayer w0.305: v1(-19.05,57.344) D103.A@-19.05,58.613 ; R105.1@-16.561,47.489 v1(-16.561,48.428) ; v1(-13.919,27.194) -13.487,26.762 R109.1@-11.532,26.762 ; C107.1@-11.532,28.896 -9.677,28.896 -9.176,28.395 U102.20@-7.063,28.395 -4.985,28.395 -4.496,27.905 v1@-4.496,27.194 ; U103.20@-5.56,56.321 -4.565,56.321 v1(-4.089,55.845) -4.089,56.48 -3.886,56.683 C101.1@-3.277,56.683 ; R133.1@-1.753,58.665 -1.092,58.665 -0.94,58.817 v1(-0.94,59.198) ; R103.1@-0.457,37.024 -0.457,39.421 -0.457,40.03 1.016,41.504 TP119.1@1.016,42.18 ; R132.1@3.023,38.192 3.023,37.684 3.48,37.227 D102.A@3.48,36.464 4.344,37.329 v1(5.207,37.329) ; v1(5.08,49.8) 3.861,49.8 3.556,49.495 R101.1@3.556,48.733 2.168,48.733 1.651,49.251 1.651,54.864 2.642,55.855 2.642,55.88 R32.2@7.95,55.88 ; C102.1@5.258,34.408 5.417,34.567 U101.20@6.932,34.567 7.918,34.567 8.077,34.408 9.906,34.408 v1(10.49,33.823) ; D105.K@11.506,22.749 11.506,23.867 C303.1@12.598,24.959 ; C109.1@14.656,51.095 v1(15.646,51.095) 15.926,50.816 U106.4@17.145,50.816 ; R110.1@18.847,36.668 v1(21.463,36.668) ; v1(20.091,28.591) D101.A@20.091,29.786
  BottomLayer w0.508: J2.8@6.35,10.582 7.671,11.903 v1@7.671,16.221
  other v1: 7.722,16.485 8.357,17.313 8.23,19.93 8.23,21.53 8.687,22.8 9.754,22.8 -4.496,27.143
  other v2: -0.483,39.395
"XD IN": FB105.1 U109.4 | length 28.5
  TopLayer w0.203: FB105.1@-3.835,7.442 -2.946,8.331 -0.94,8.331 -0.229,7.62 1.727,7.62 v1(2.489,8.382)
  BottomLayer w0.203: U109.4@-10.424,20.354 -10.424,18.797 -6.477,14.85 0.152,14.85 2.489,12.513 v1(2.489,8.382)
"XD OUT": FB104.1 U108.1 U108.2 | length 34.8
  TopLayer w0.203: FB104.1@-6.375,7.442 -5.004,8.814 -0.483,8.814 v1(-0.051,8.382)
  BottomLayer w0.203: U108.2@-16.104,24.164 -16.104,23.46 -15.875,23.232 -15.454,23.232 ; U108.1@-15.454,24.164 -15.454,23.232 ; v1@-0.051,8.55 -0.051,12.31 -0.635,12.894 -7.925,12.894 -15.454,20.423 -15.454,23.232
~PIR~: FB106.1 R133.2 U103.16 | length 70.2
  TopLayer w0.203: FB106.1@3.759,7.442 3.759,8.103 4.039,8.382 v1(5.029,8.382)
  MidLayer4 w0.203: -8.433,58.919 -9.474,57.877 -9.83,57.877 -13.005,54.702 -13.005,28.743 v1(-8.026,23.765)
  BottomLayer w0.203: v1@-8.077,58.921 U103.16@-5.56,58.921 -4.904,58.921 -4.496,58.512 -4.039,58.512 -3.886,58.665 R133.2@-3.277,58.665 ; v1(-8.026,23.765) -6.934,22.673 -6.934,18.101 -4.733,15.9 0.372,15.9 5.029,11.243 v1(5.029,8.382)
  other v1: -8.077,58.919
pads on no net: R52.3 U2.3 U9.5 U101.7 U101.10 U101.22 U101.25 U102.10 U102.26 U103.10 U103.11 U103.12 U103.17 U103.26 U106.1 Y1.3 Y2.3
copper on no net:
  other v1: -9.144,15.002 -7.747,15.002

## Polygon pours and split planes (outlines as drawn)
GND_SIGNAL on TopLayer "TopLayer-GND_SIGNAL" (solid, remove dead copper, pour order 1000): -0.118,35.648 -0.118,38.315 -0.499,38.696 -0.499,42.76 0.39,43.649 1.406,43.649 3.057,45.3 4.708,45.3 4.708,44.284 3.184,44.284 2.803,43.903 2.803,42.887 2.168,42.252 2.168,36.41 1.406,35.648
GND_SIGNAL on TopLayer "Top Layer-GND" (solid, remove dead copper, pour order 1000): -12.573,9.033 12.433,9.033 15.735,12.335 22.479,12.335 22.479,12.462 24.003,13.986 24.003,61.738 22.606,63.135 -22.606,63.135 -23.749,61.992 -23.749,12.843 -22.987,12.081 -15.621,12.081
+5V on TopLayer "Top Layer-+5V" (solid, pour order 1000): 3.632,14.748 5.414,14.748 6.1,15.434 6.1,17.085 5.639,17.085 4.47,15.926 3.632,15.926
GND_SIGNAL on MidLayer1 "Mid1Layer-GND" (solid, remove dead copper, pour order 1002): -8.255,1.905 8.89,1.905 10.033,3.048 10.033,4.842 12.446,9.16 16.256,11.827 22.733,11.827 23.876,12.97 23.876,62.881 -23.495,62.881 -23.495,13.097 -22.352,11.954 -16.383,11.954 -12.573,9.033 -9.779,4.842 -9.779,3.429
GND_COM on MidLayer2 "MID2-GND_COM" (solid, pour order 1003): -22.352,11.929 -9.144,11.929 -9.144,6.671 10.846,6.671 10.846,11.929 22.835,11.929 23.876,12.97 23.876,62.373 23.368,62.881 -22.885,62.881 -23.749,62.017 -23.749,13.326
VCC on MidLayer3 "MID3-VCC" (solid, pour order 1004): 10.693,20.311 23.876,20.285 23.876,62.373 23.368,62.881 -22.962,62.881 -23.749,62.094 -23.749,21.25 -11.328,21.25 -11.328,14.443 10.693,14.443
3.3VDC on MidLayer3 "MID3-3.3VDC" (solid, pour order 1005): -23.749,20.895 -11.709,20.895 -11.709,14.113 11.074,14.113 11.074,19.93 23.851,19.93 23.876,13.097 22.784,12.005 15.062,11.979 9.931,6.833 -10.439,6.833 -10.49,6.883 -15.646,12.03 -22.682,12.005 -23.749,13.072
GND_COM on MidLayer4 "MID4-GND_COM" (solid, remove dead copper, pour order 1002): -22.377,12.014 -23.724,13.36 -23.724,14.961 -23.724,61.595 -22.428,62.89 22.657,62.89 23.876,61.671 23.876,13.233 22.657,12.014
3.3VDC on BottomLayer "BOT-3.3VDC" (solid, pour order 1002): -7.595,8.169 -10.49,8.169 -10.516,7.28 -10.947,7.28 -11.735,8.068 -11.735,9.109 -7.645,9.109 -7.595,9.058
VCC on BottomLayer "Bot Layer-VCC" (solid, pour order 1001): 6.172,15.002 7.722,15.002 7.722,16.043 9.677,17.999 9.677,20.209 8.611,20.209 8.611,22.038 8.636,22.063 11.481,22.063 11.481,23.435 8.788,23.435 7.823,22.47 7.823,17.059 6.198,15.434
GND_COM on BottomLayer "BOTTOM-GND_COM" (solid, pour order 1001): 6.553,6.696 9.398,6.696 9.398,8.423 6.553,8.423
GND_SIGNAL on BottomLayer "Top Layer-GND_SIGNAL" (solid, pour order 1000): -5.385,8.195 -5.385,11.065 -5.791,11.471 -9.525,11.471 -9.855,11.141 -9.855,9.973 -9.55,9.668 -7.823,9.668 -7.315,9.16 -7.315,8.195
GND_COM on BottomLayer "Bot Layer-GND" (solid, pour order 1006): 8.382,16.145 9.423,17.186 10.439,17.186 13.97,13.681 8.687,13.681 8.382,13.986
+5V on BottomLayer "Bot Layer-+5V" (solid, pour order 1005): 6.782,16.551 6.299,16.551 5.817,16.069 5.817,15.307 5.537,15.027 3.632,15.027 3.632,15.637 5.105,17.11 6.782,17.11
GND_COM on BottomLayer "Bot Layer-GND" (solid, pour order 1004): 12.675,17.771 12.675,16.856 13.259,16.272 15.519,16.272 16.383,17.136 16.383,19.523 15.977,19.93 13.919,19.93 13.919,19.472 14.884,19.472 15.342,19.015 15.342,16.983 15.138,16.78 13.589,16.78 13.31,17.059 13.31,17.771
3.3VDC on BottomLayer "Bot Layer-F3.3V" (solid, pour order 1003): 10.973,20.869 10.973,17.11 13.741,14.342 14.961,14.342 15.951,15.332 20.091,15.332 20.091,19.091 16.662,19.091 16.662,17.009 15.621,15.967 13.081,15.967 11.76,17.313 11.76,20.869
NetD105_A on BottomLayer "Bot Layer-D105A" (solid, pour order 1002): 13.36,20.438 13.36,23.384 19.202,23.384 19.202,20.438
-3.3VDC- on BottomLayer "BOT-3.3VDC" (solid, pour order 1000): -8.001,7.493 -9.754,7.493 -9.754,2.54 -8.001,2.54
-GND_COM- on BottomLayer "BOT-GND_COM" (solid, pour order 1001): 8.814,6.071 1.016,6.071 -2.057,9.169 -4.597,9.169 -4.597,7.061 -2.769,7.061 -0.051,4.343 -0.025,2.565 2.515,2.565 2.515,4.242 3.175,4.902 8.814,4.902

## Keep-outs
KeepOutLayer:
  lines w0.508: -108.831,-4.667 -108.831,45.371 -48.633,45.371 -48.633,-4.667 -108.831,-4.667

## Other copper
TopLayer:
  pour cut-out: -21.009,22.998 -21.009,30.821 -13.059,30.821 -13.059,22.998
  pour cut-out: -13.77,36.003 -9.35,36.003 -9.35,40.956 -4.499,40.956 -4.499,34.555 -9.376,34.555 -9.376,31.405 -13.77,31.405
  pour cut-out: 7.922,35.139 -1.222,35.139 -1.222,31.583 7.922,31.583
  pour cut-out: 1.851,48.822 1.851,44.486 -3.457,44.486 -3.457,48.822
  pour cut-out: 7.058,49.693 18.336,49.693 18.336,47.966 22.73,47.966 22.73,40.803 7.058,40.803
  pour cut-out: 9.827,63.381 9.827,53.221 0.581,53.221 0.581,63.381
  pour cut-out: -15.802,52.51 -15.802,53.653 -19.333,53.653 -19.333,52.51 -21.974,52.51 -21.974,53.703 -22.635,53.703 -22.635,63.99 -18.266,63.99 -15.24,64.024 -9.779,64.024 -9.782,60.942 -7.852,60.942 -7.852,52.51
  pour cut-out: -21.009,22.998 -21.009,30.821 -13.059,30.821 -13.059,22.998
  pour cut-out: -13.77,36.003 -9.35,36.003 -9.35,40.956 -4.499,40.956 -4.499,34.555 -9.376,34.555 -9.376,31.405 -13.77,31.405
  pour cut-out: 7.922,35.139 -1.222,35.139 -1.222,31.583 7.922,31.583
  pour cut-out: 1.851,48.822 1.851,44.486 -3.457,44.486 -3.457,48.822
  pour cut-out: 7.058,49.693 18.336,49.693 18.336,47.966 22.73,47.966 22.73,40.803 7.058,40.803
  text "HANDHELD" at -17.4,46.1 h1.02
  text "READER" at -16.7,44.6 h1.02
  text "REV 1" at -16.1,43 h1.02
  text ".Layer_Name" at -3.353,-15.545 h2.03
MidLayer1:
  text ".Layer_Name" at 16.662,-46.584 h2.03
MidLayer2:
  text ".Layer_Name" at 16.916,-46.355 h2.03
MidLayer3:
  text ".Layer_Name" at 16.993,-46.533 h2.03
MidLayer4:
  text ".Layer_Name" at 16.916,-46.355 h2.03
BottomLayer:
  text "0212" at -20.498,43.815 h1.27 r270
  text ".Layer_Name" at 33.045,-46.253 h2.03

## Silkscreen, mask and mechanical layers (free items; w line width, h text height)
TopOverlay:
  lines w0.254: -21.433,28.27 -21.433,25.704 -21.433,28.27 ; -21.433,28.27 -19.452,28.27 -21.433,28.27 ; -22.5,28.752 -22.5,29.032 -22.5,28.752 ; -2.979,29.442 -2.797,29.442 -2.979,29.442 ; -2.979,32.414 -2.797,32.414 -2.979,32.414 ; -2.954,31.423 -2.797,31.423 -2.954,31.423 ; -1.654,29.442 -1.354,29.442 -1.654,29.442 ; -1.654,31.524 -0.765,31.524 -1.654,31.524 ; -1.654,32.414 -1.354,32.414 -1.654,32.414 ; 14.547,40.295 16.595,40.295 14.547,40.295 ; 18.119,40.262 18.865,40.262 18.119,40.262 ; 18.865,37.96 18.865,40.338 18.865,37.96 ; 19.414,35.258 21.405,35.258 19.414,35.258 ; 21.405,40.295 22.675,40.295 21.405,40.295
  text "ACTIVE" at 7.4,20.8 h1.02
  text "WAVE" at 7.7,19.3 h1.02
  text "INC" at 8.5,17.8 h1.02
  text ".Layer_Name" at -3.454,-15.545 h2.03
BottomOverlay:
  text "E" at -9.169,47.879 h1.52
  text "C" at 10.109,27.661 h1.52
  text "D" at -4.14,21.641 h1.52
  text ".Layer_Name" at 16.383,-46.736 h2.03
TopPaste:
  lines w0.203: -108.069,-4.667 -108.831,-4.667 ; -108.831,-4.667 -108.831,-3.702 -108.831,-4.667
  text ".Layer_Name" at 16.535,-46.431 h2.03
BottomPaste:
  text ".Layer_Name" at -81.407,-12.668 h2.54
  text ".Layer_Name" at 16.434,-46.736 h2.03
TopSolder:
  text ".Layer_Name" at 16.612,-46.431 h2.03
BottomSolder:
  text ".Layer_Name" at -80.137,-12.668 h2.54
  text ".Layer_Name" at 16.434,-46.533 h2.03
AssemblyTop:
  text ".Layer_Name" at -8.306,-3.226 h2.03
Outline:
  lines w0.254: 25,10.979 25,64.008 ; 25.006,11 20,11 ccw(c20,2) 11,2 cw(c9,2) 9,0 -9,0 cw(c-9,2) -11,2 ccw(c-20,2) -20,11 -25.019,11 -25.019,64 25.019,64
Title:
  lines w0.254: -41.224,-46.836 -41.224,-18.896 cw(c-38.684,-18.896) -38.684,-16.356 67.996,-16.356 cw(c67.996,-18.896) 70.536,-18.896 70.536,-46.836 cw(c67.996,-46.836) 67.996,-49.376 -38.684,-49.376 ; -41.224,-46.811 ccw(c-38.658,-46.811) -38.703,-49.376 ; -38.706,-48.106 cw(c-38.684,-46.836) -39.954,-46.836 -39.954,-44.296 cw(c-38.684,-44.296) -38.684,-43.026 3.861,-43.026 cw(c3.861,-44.296) 5.131,-44.296 5.131,-46.836 ; -38.706,-41.756 cw(c-38.684,-40.486) -39.954,-40.486 -39.954,-34.771 cw(c-38.684,-34.771) -38.684,-33.501 -19.634,-33.501 ; -38.684,-48.106 3.861,-48.106 ; -38.684,-41.756 -19.634,-41.756 ; -19.652,-33.502 cw(c-19.608,-34.746) -18.364,-34.746 ; -19.634,-32.231 -38.684,-32.231 cw(c-38.684,-30.961) -39.954,-30.961 -39.954,-25.246 cw(c-38.684,-25.246) -38.684,-23.976 -19.634,-23.976 ; -19.608,-41.756 ccw(c-19.608,-40.511) -18.364,-40.511 ; -19.608,-23.976 cw(c-19.608,-25.221) -18.364,-25.221 ; -19.583,-32.231 ccw(c-19.583,-31.012) -18.364,-31.012 ; -18.364,-40.486 -18.364,-34.771 ; -18.364,-30.961 -18.364,-25.246 ; -17.094,-40.511 ccw(c-15.849,-40.511) -15.849,-41.756 ; -17.094,-40.486 -17.094,-37.311 cw(c-15.824,-37.311) -15.824,-36.041 24.816,-36.041 ; -17.094,-33.526 ccw(c-15.849,-33.526) -15.849,-34.771 ; -17.094,-33.501 -17.094,-25.246 cw(c-15.824,-25.246) -15.824,-23.976 36.246,-23.976 cw(c36.246,-25.246) 37.516,-25.246 37.516,-33.501 cw(c36.246,-33.501) 36.268,-34.771 ; -15.824,-41.756 24.816,-41.756 ; -15.824,-34.771 36.246,-34.771 ; 3.891,-48.106 ccw(c3.912,-46.887) 5.131,-46.844 ; 7.649,-48.106 cw(c7.671,-46.836) 6.401,-46.836 6.401,-44.296 cw(c7.671,-44.296) 7.671,-43.026 50.216,-43.026 cw(c50.216,-44.296) 51.486,-44.296 51.486,-46.836 ; 7.671,-48.106 50.216,-48.106 ; 24.842,-41.756 ccw(c24.842,-40.511) 26.086,-40.49 ; 24.842,-36.041 cw(c24.842,-37.286) 26.086,-37.286 ; 26.086,-40.486 26.086,-37.311 ; 27.356,-40.486 27.356,-37.311 ; 27.356,-40.461 ccw(c28.652,-40.461) 28.629,-41.756 ; 27.358,-37.324 cw(c28.575,-37.26) 28.575,-36.041 ; 28.626,-41.756 36.246,-41.756 ccw(c36.246,-40.486) 37.516,-40.486 37.516,-37.311 ; 28.626,-36.041 36.246,-36.041 ; 36.272,-36.041 cw(c36.272,-37.286) 37.516,-37.286 ; 38.786,-40.511 ccw(c40.031,-40.511) 40.052,-41.756 ; 38.786,-40.486 38.786,-37.311 cw(c40.056,-37.311) 40.056,-36.041 67.996,-36.041 ; 40.056,-41.756 67.996,-41.756 ccw(c67.996,-40.486) 69.266,-40.486 69.266,-37.286 ccw(c68.022,-37.286) 68.022,-36.041 ; 50.246,-48.106 ccw(c50.267,-46.887) 51.486,-46.844 ; 52.756,-46.861 ccw(c54.001,-46.861) 54.022,-48.106 ; 52.756,-46.836 52.756,-44.296 cw(c54.026,-44.296) 54.026,-43.026 67.996,-43.026 ; 54.026,-48.106 67.996,-48.106 ccw(c67.996,-46.836) 69.266,-46.836 69.266,-44.296 ; 67.978,-17.627 cw(c68.022,-18.871) 69.266,-18.871 ; 67.996,-43.026 cw(c67.996,-44.296) 69.266,-44.274 ; 67.996,-17.626 40.056,-17.626 ccw(c40.056,-18.896) 38.786,-18.896 38.786,-33.501 ccw(c40.056,-33.501) 40.056,-34.771 67.996,-34.771 ccw(c67.996,-33.501) 69.266,-33.501 69.266,-18.896 ; -39.954,-21.436 ccw(c-38.684,-21.436) -38.684,-22.706 36.246,-22.706 ccw(c36.246,-21.436) 37.516,-21.436 37.516,-18.896 ccw(c36.246,-18.896) 36.246,-17.626 -38.684,-17.626 ccw(c-38.684,-18.896) -39.954,-18.896 -39.954,-21.436
  text "Active Wave" at -12.522,-21.309 h2.44
  text "Active Wave" at 41.1,-21.711 h2.54
  text "902 Clint Moore Rd." at 39.83,-24.378 h1.63
  text "TITLE:" at -16.141,-26.199 h1.35
  text "ENGINEER:" at -38.684,-26.516 h1.35
  text "Suite 126" at 47.323,-27.045 h1.63
  text "HANDHELD" at 3.537,-28.881 h2.44
  text "Boca Raton FL." at 43.894,-29.458 h1.63
  text "PHONE:" at -38.684,-31.279 h1.35
  text "READER" at 5.588,-32.115 h2.03
  text "561-999-9422" at 45.291,-32.506 h1.63
  text "Drawn by:" at -38.684,-36.168 h1.35
  text "JCMII" at -28.957,-36.195 h1.35
  text "PART NO.:" at -15.824,-38.264 h1.35
  text "REV:" at 28.309,-38.264 h1.35
  text "DATE:" at 40.056,-38.264 h1.35
  text "125/2012" at 50.591,-39.609 h1.35
  text "0" at 32.754,-40.169 h1.35
  text "PHONE:" at -38.684,-40.804 h1.35
  text "FILE NAME:" at -38.684,-45.312 h1.35
  text "LAYER:" at 8.052,-45.312 h1.35
  text "GERBER:" at 54.28,-45.312 h1.35
Notes:
  lines w0.635: 90.729,6.731 103.683,6.731
  text "NOTES" at 90.551,8.28 h2.54
  text "1) MATERIAL IS FR4" at 90.729,2.083 h2.54
  text "2) 0.031\" THICK 6 LAYER BOARD" at 90.399,-3.48 h2.54
  text "3) 1 OUNCE COPPER" at 90.526,-9.077 h2.54
  text "4) HASL SMOBC" at 90.526,-15.224 h2.54
  text "5) 4 UP WEB ROUTED PANEL" at 90.526,-21.117 h2.54
  text "6) WHITE SILKSCREEN BOTH SIDES" at 90.399,-26.73 h2.54
  text "7) REMOVE SILKSCREEN FROM PADS" at 90.272,-32.369 h2.54
  text "8) SILKSCREEN OVER TENTED VIAS" at 90.272,-38.135 h2.54
  text "9) GREEN SOLDER MASK BOTH SIDES" at 90.145,-43.621 h2.54
Panel:
  circle w0.254: c78.207,90 r0.635
  circle w0.254: c-28.169,90 r0.635
  circle w0.254: c-28.169,25 r0.635
  circle w0.254: c78.207,25 r0.635
  lines w0.254: -31.344,11.049 -24.994,11.049 ; -31.344,116.979 -24.994,116.979 -24.994,63.951 ; -25.044,116.979 -19.994,116.979 ccw(c-19.994,125.979) -10.994,125.979 cw(c-8.994,125.979) -8.994,127.979 9.006,127.979 cw(c9.006,125.979) 11.006,125.979 ccw(c20.006,125.979) 20.006,116.979 30.006,116.979 ccw(c30.006,125.979) 39.006,125.979 cw(c41.006,125.979) 41.006,127.979 59.006,127.979 cw(c59.006,125.979) 61.006,125.979 ccw(c70.006,125.979) 70.006,116.979 75.032,116.979 81.382,116.979 ; -25.019,10.979 -19.994,10.979 cw(c-19.994,1.979) -10.994,1.979 ccw(c-8.994,1.979) -8.994,-0.021 9.006,-0.021 ccw(c9.006,1.979) 11.006,1.979 cw(c20.006,1.979) 20.006,10.979 30.006,10.979 cw(c30.006,1.979) 39.006,1.979 ccw(c41.006,1.979) 41.006,-0.021 59.006,-0.021 ccw(c59.006,1.979) 61.006,1.979 cw(c70.006,1.979) 70.006,10.979 75.057,10.979 81.407,10.979 ; -24.994,10.979 -24.994,64.008 ; -24.994,63.979 25.006,63.979 ; 25.006,10.979 25.006,63.979 ; 25.006,116.979 25.006,63.979 ; 75.006,10.979 75.006,64.008 ; 75.006,63.951 75.006,116.979 ; 75.006,63.979 25.006,63.979
  lines w0.256: -31.344,11.049 -31.344,116.979 ; 81.382,11.005 81.382,116.979
  text "50mil surface pad on top and bottom" at 86.843,24.511 h1.52
  text ".Layer_Name" at 17.018,-46.558 h2.03
AssemblyBottom:
  text ".Layer_Name" at 10.744,-3.378 h2.03
DrillDrawing:
  lines w0.076: 39.802,-0.508 61.874,-0.508 ; 39.802,0.922 61.874,0.922 ; 38.278,-9.423 ccw(c38.735,-9.423) 38.735,-9.881 62.941,-9.881 ccw(c62.941,-9.423) 63.398,-9.423 63.398,2.108 ccw(c62.941,2.108) 62.941,2.565 38.735,2.565 ccw(c38.735,2.108) 38.278,2.108 38.278,-9.423
  text ".Legend" at 36.855,18.517 h1.27
  text "Layer Stack Up Detail for: SmallHandheldRev0_x1.PcbDoc" at 39.802,1.457 h0.41
  text "Layer" at 39.802,0.389 h0.33
  text "Name" at 39.802,-0.272 h0.33
  text "TopLayer" at 39.802,-1.194 h0.46
  text "MidLayer1" at 39.802,-2.491 h0.46
  text "MidLayer2" at 39.802,-3.787 h0.46
  text "MidLayer3" at 39.802,-5.084 h0.46
  text "MidLayer4" at 39.802,-6.38 h0.46
  text "BottomLayer" at 39.802,-7.677 h0.46
  text ".Layer_Name" at 16.485,-46.304 h2.03

## Dimensions
9,0 to 25.019,64 on Dimension
-25,11.049 to 25,10.979 on Dimension
79.35,25.298 to 85.522,26.213 on Panel